# Altium PCB LM-003.PcbDoc (part 1 of 2)
Units mm, origin at the board's own origin, x right, y up, seen from the top; angles counter-clockwise.
Board outline 67.01 x 194 mm, 6 copper layers (Top Layer, +5V, Mid-Layer 1, +3.3V, Mid-Layer 2, Bottom Layer), stack 1.23 mm thick; 63 components, 97 nets, 377 pads, 45 vias.
Unrouted connection lines stored in the file: 85.
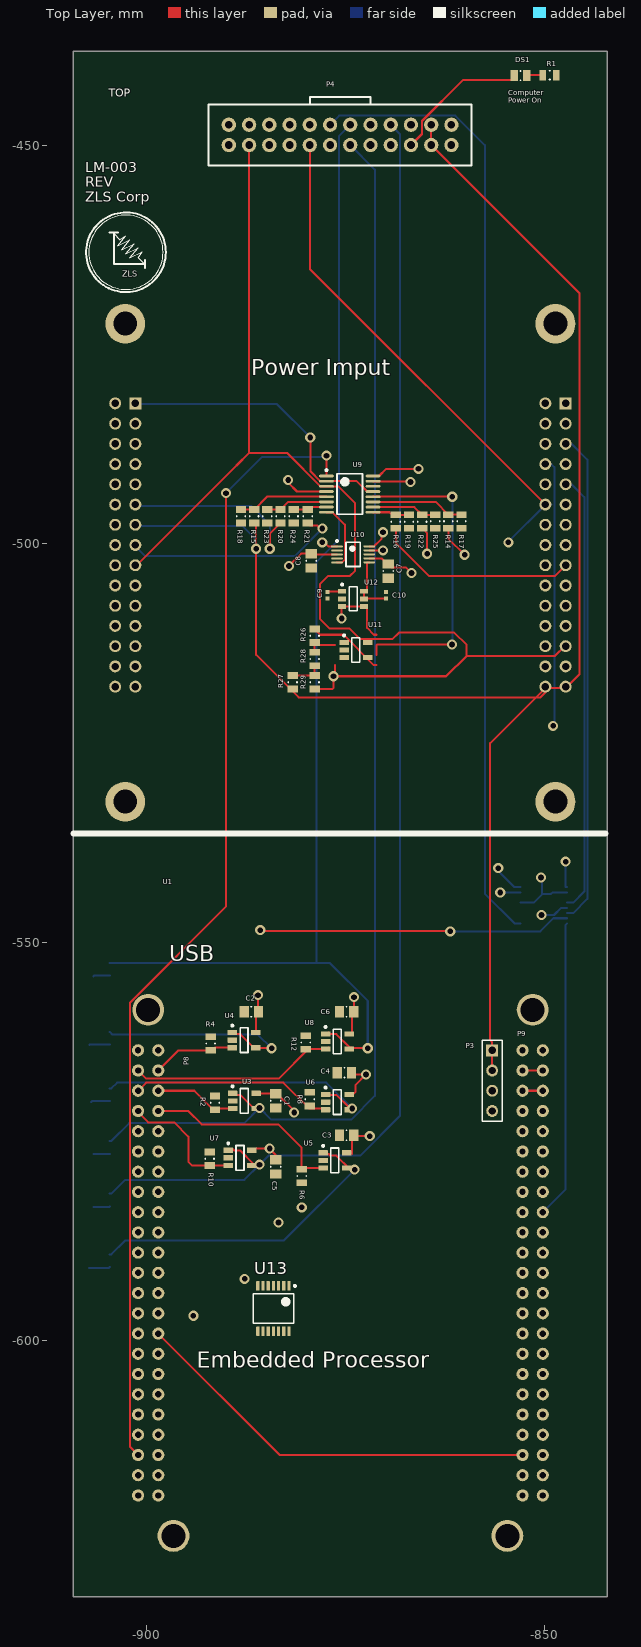
[diagram p0: Top Layer view]
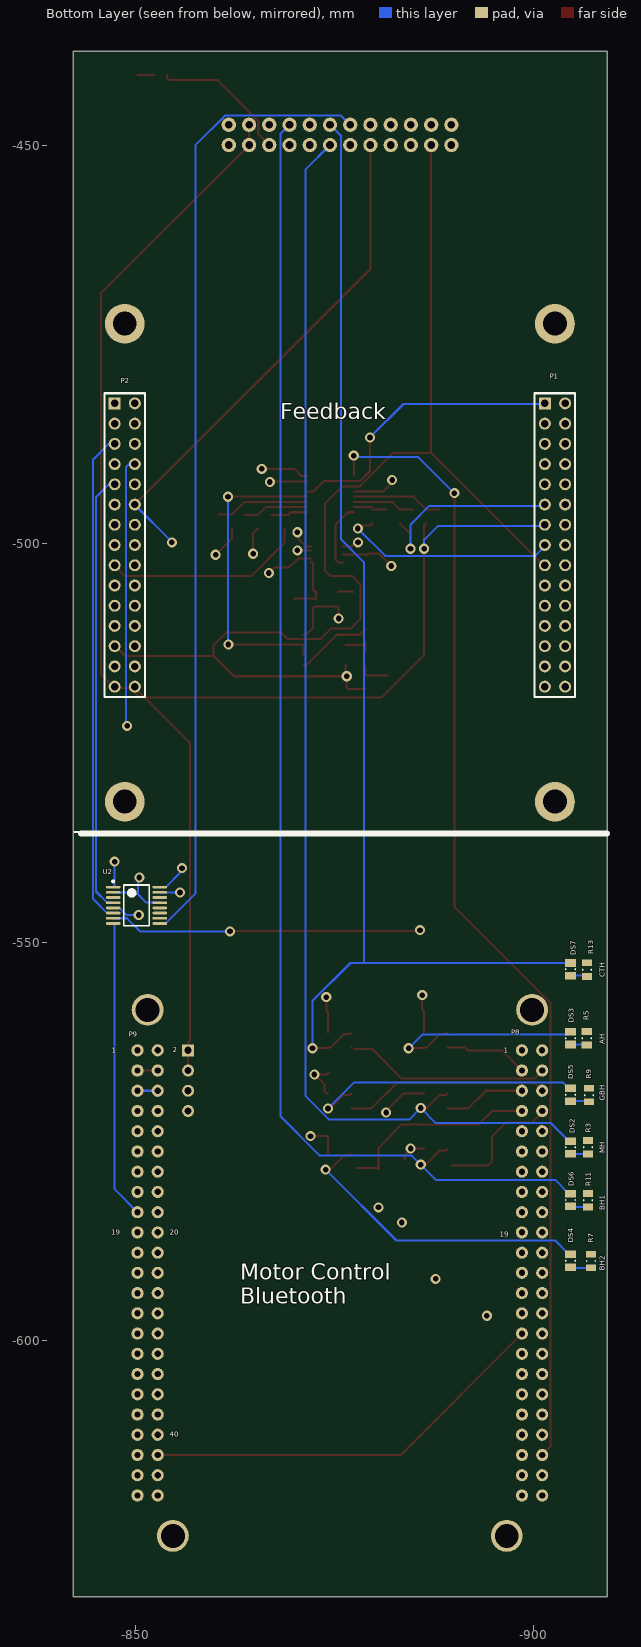
[diagram p1: Bottom Layer view, seen from below]
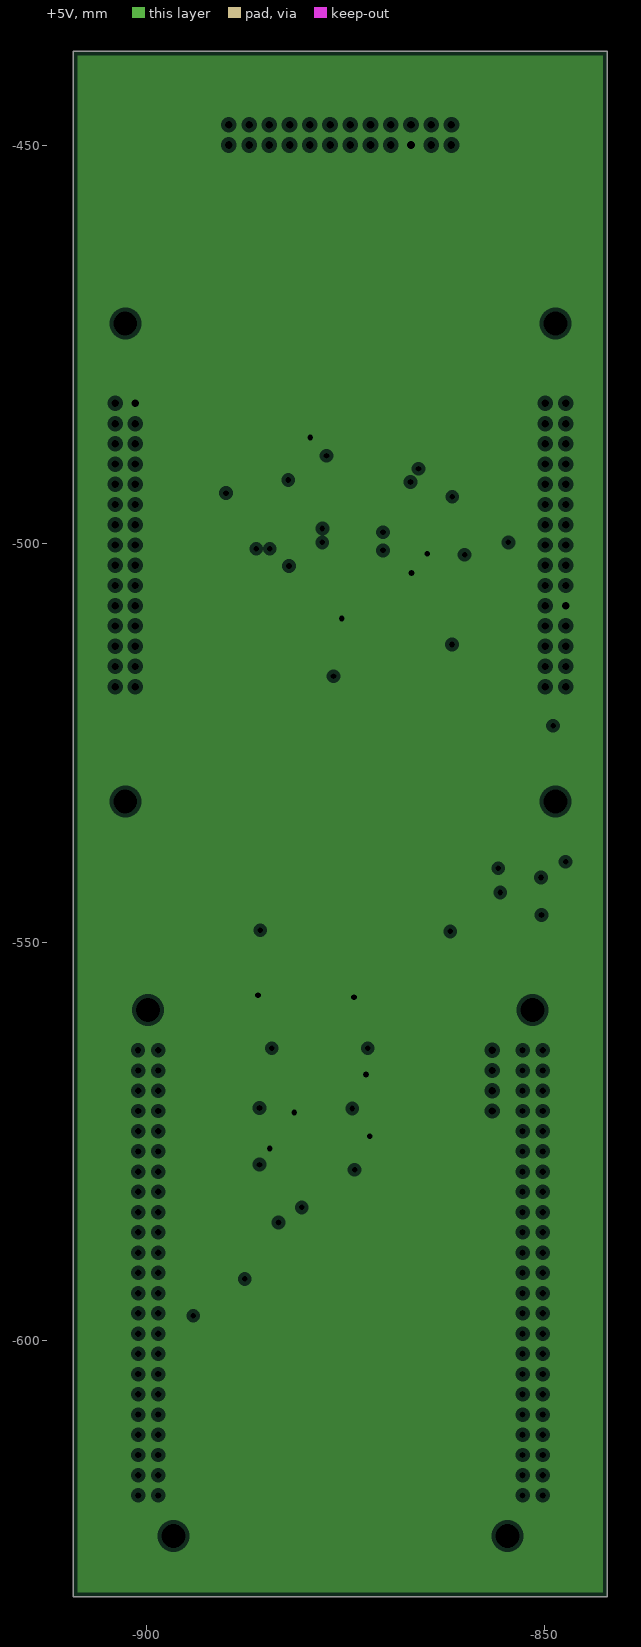
[diagram p2: +5V, clearances drawn from the general rule]
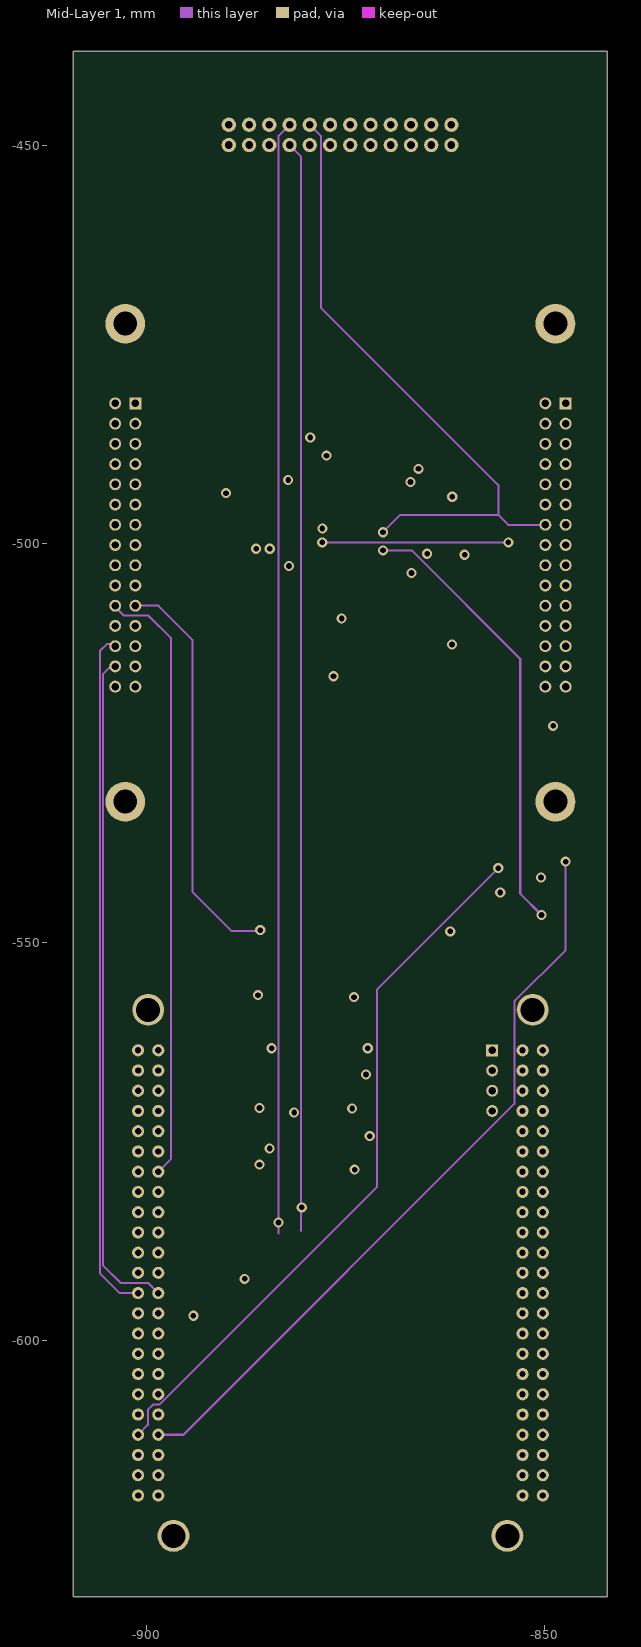
[diagram p3: Mid-Layer 1]
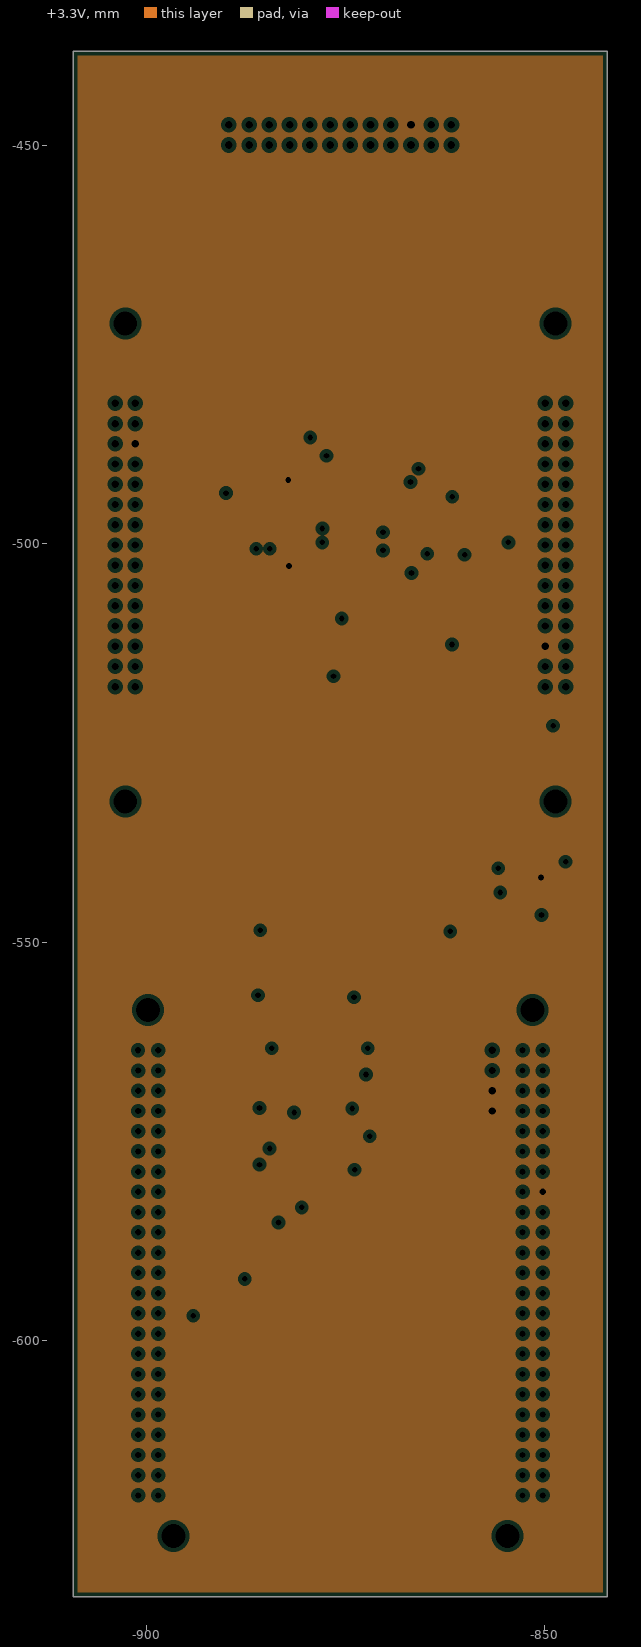
[diagram p4: +3.3V, clearances drawn from the general rule]
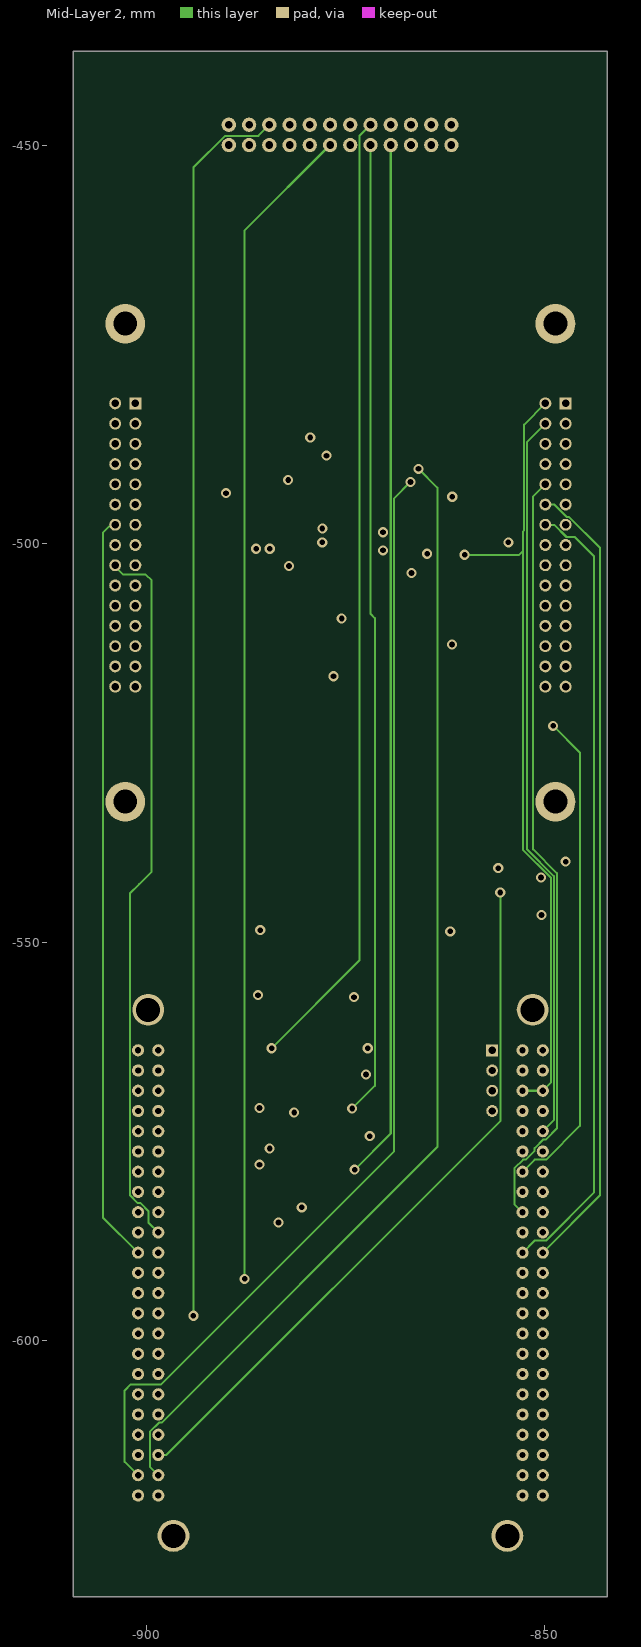
[diagram p5: Mid-Layer 2]

## Layer stack, top to bottom
Top Solder: solder mask 0.0102, Solder Resist, Dk 3.5
Top Layer: signal copper 0.0356
Dielectric 1: core 0.254, FR-4, Dk 4.2
+5V: plane copper 0.036, net +5
Dielectric 7: prepreg 0.127, Dk 4.2
Mid-Layer 1: signal copper 0.0356
Dielectric 6: core 0.254, Dk 4.2
+3.3V: plane copper 0.036, net +3.3
Dielectric2: prepreg 0.127, FR-4, Dk 4.2
Mid-Layer 2: signal copper 0.0356
Dielectric 5: core 0.254, Dk 4.2
Bottom Layer: signal copper 0.0356
Bottom Solder: solder mask 0.0102, Solder Resist, Dk 3.5

## Board outline
-909.17,-632.188 -842.165,-632.188 -842.165,-438.187 -909.17,-438.187

## Design rules (kind name [scope] priority, off if disabled: settings)
Clearance [All] p1: gap=0.127 ignorepadtopadclearanceinfootprint=FALSE except(0: Arc-Hole Track-Hole SMDPad-Hole THPad-Hole Via-Hole Fill-Hole Poly-Hole Region-Hole Text-Hole)
ComponentClearance [All] p1: gap=0.229 collisioncheckmode=3 verticalgap=0.254 showdistances=FALSE
HoleSize [All] p1: absolutevalues=TRUE maxlimit=5 minlimit=0.127 maxpercent=80.000 minpercent=20.000
MinimumAnnularRing [All] p1: minimumring=0.254
MinimumSolderMaskSliver [All] p1: minsoldermaskwidth=0.051
PlaneClearance [All] p1: clearance=0.508
PlaneConnect [All] p1: planeconnectstyle=Relief reliefexpansion=0.508 reliefentries=4 reliefconductorwidth=0.254 reliefairgap=0.254
PolygonConnect [All] p1: connectstyle=Relief reliefconductorwidth=0.254 reliefentries=4 polygonreliefangle="90 Angle" airgapwidth=0.254
RoutingVias [All] p1: holewidth=0.3 width=0.7 viastyle="Through Hole" minholewidth=0.1 minwidth=0.381 maxholewidth=0.711 maxwidth=1.27
SilkToSilkClearance [All] p1: silktosilkclearance=0.1
SilkToSolderMaskClearance [IsPad] p1: minsilkscreentomaskgap=0.064 clearancetoexposedcopper=TRUE
SolderMaskExpansion [All] p1: expansion=0.051
Width [All] p1: maxlimit=1 minlimit=0.127 preferedwidth=0.254
23 further rules are at their usual default settings.

## Classes and differential pairs
component class heater_control: C1 C2 C3 C4 C5 C6 DS2 DS3 DS4 DS5 DS6 DS7 P4 R2 R3 R4 R5 R6 R7 R8 R9 R10 R11 R12 R13 U3 U4 U5 U6 U7 U8
component class ADC: C7 C8 C9 C10 R14 R15 R16 R17 R18 R19 R20 R21 R22 R23 R24 R25 R26 R27 R28 R29 U9 U10 U11 U12
component class Connectors: DS1 P1 P2 P3 P14 P16 P? R1
component class "BBB Headers": U1 U2 U13

## Components (designator, comment, footprint, x,y, rotation, side; value= is the part's Value field where it differs from the comment)
C1 "CAP CER 0.1UF 25V X7R 0805" CAPC0805(2012)145_N -883.758,-569.941 r90 top
C2 "CAP CER 0.1UF 25V X7R 0805" CAPC0805(2012)145_N -886.806,-558.765 r0 top
C3 "CAP CER 0.1UF 25V X7R 0805" CAPC0805(2012)145_N -874.868,-574.259 r0 top
C4 "CAP CER 0.1UF 25V X7R 0805" CAPC0805(2012)145_N -875.122,-566.385 r0 top
C5 "CAP CER 0.1UF 25V X7R 0805" CAPC0805(2012)145_N -883.758,-578.231 r90 top
C6 "CAP CER 0.1UF 25V X7R 0805" CAPC0805(2012)145_N -874.868,-558.765 r0 top
C7 "CAP CER 0.1UF 25V X7R 0805" CAPC0805(2012)145_N -869.637,-503.431 r270 top
C8 "CAP CER 0.1UF 25V X7R 0805" CAPC0805(2012)145_N -879.289,-502.161 r270 top
C9 "0.1uF" CAPC0402(1005)60_L -877.257,-506.479 r270 top
C10 "0.1uF" CAPC0402(1005)60_L -869.891,-506.479 r270 top
DS1 "Lite-On LTST-S220KGKT Green LED, 571 nm 2012 (0805) Side View, Rectangle Lens SMD package" 0805C_L -853.031,-441.239 r0 top
DS2 "Visible Name Value Type    False Description Lite-On LTST-S220KRKT Red LED, 631 nm 2012 (0805) Side View, Rectangle Lens SMD package STRING" 0805C_L -904.586,-575.783 r270 bottom
DS3 "Visible Name Value Type    False Description Lite-On LTST-S220KRKT Red LED, 631 nm 2012 (0805) Side View, Rectangle Lens SMD package STRING" 0805C_L -904.586,-562.067 r270 bottom
DS4 "Visible Name Value Type    False Description Lite-On LTST-S220KRKT Red LED, 631 nm 2012 (0805) Side View, Rectangle Lens SMD package STRING" 0805C_L -904.586,-590.007 r270 bottom
DS5 "Visible Name Value Type    False Description Lite-On LTST-S220KRKT Red LED, 631 nm 2012 (0805) Side View, Rectangle Lens SMD package STRING" 0805C_L -904.586,-569.179 r270 bottom
DS6 "Visible Name Value Type    False Description Lite-On LTST-S220KRKT Red LED, 631 nm 2012 (0805) Side View, Rectangle Lens SMD package STRING" 0805C_L -904.586,-582.387 r270 bottom
DS7 "Visible Name Value Type    False Description Lite-On LTST-S220KRKT Red LED, 631 nm 2012 (0805) Side View, Rectangle Lens SMD package STRING" 0805C_L -904.586,-553.431 r270 bottom
P1 "SSW-115-23-G-D" SSW-115-23-G-D -901.365,-482.387 r270 bottom locked
P2 "SSW-115-23-G-D" SSW-115-23-G-D -847.365,-482.387 r270 bottom locked
P3 "TSW-104-14-G-S" HDR1X4 -856.58,-563.591 r270 top locked
P4 "IPL1-112-01-F-S-K" IPL1-112-01-F-S-K -875.665,-448.691 r0 top
R1 "5.1K" RESC0805(2012)_L -849.376,-441.191 r0 top
R2 "20k" RESC0805(2012)_L -891.378,-570.195 r90 top
R3 "4.99K" RESC0805(2012)_L -906.78,-575.777 r90 bottom
R4 "20K" RESC0805(2012)_L -891.921,-562.737 r90 top
R5 "4.99k" RESC0805(2012)_L -906.618,-562.067 r90 bottom
R6 "20K" RESC0805(2012)_L -880.491,-579.374 r270 top
R7 "4.99K" RESC0805(2012)_L -907.161,-590.042 r90 bottom
R8 "20K" RESC0805(2012)_L -879.475,-569.722 r90 top
R9 "4.99K" RESC0805(2012)_L -906.907,-569.214 r90 bottom
R10 "20K" RESC0805(2012)_L -892.048,-577.215 r90 top
R11 "4.99K" RESC0805(2012)_L -906.78,-582.422 r90 bottom
R12 "20K" RESC0805(2012)_L -879.983,-562.61 r90 top
R13 "4.99K" RESC0805(2012)_L -906.653,-553.466 r90 bottom
R14 "10k" RESC0805(2012)_L -862.076,-497.205 r90 top
R15 "47.5K" RESC0805(2012)_L -886.461,-496.57 r90 top
R16 "100K" RESC0805(2012)_L -868.68,-497.227 r90 top
R17 "10k" RESC0805(2012)_L -860.425,-497.205 r270 top
R18 "10k" RESC0805(2012)_L -888.111,-496.57 r270 top
R19 "10k" RESC0805(2012)_L -867.029,-497.227 r270 top
R20 "47.5K" RESC0805(2012)_L -883.158,-496.57 r90 top
R21 "47.5K" RESC0805(2012)_L -879.729,-496.57 r90 top
R22 "10k" RESC0805(2012)_L -865.378,-497.227 r90 top
R23 "10k" RESC0805(2012)_L -884.809,-496.57 r270 top
R24 "10k" RESC0805(2012)_L -881.507,-496.57 r270 top
R25 "10k" RESC0805(2012)_L -863.727,-497.205 r270 top
R26 "100K" RESC0805(2012)_L -878.867,-511.556 r90 top
R27 "100k" RESC0805(2012)_L -881.634,-517.398 r90 top
R28 "100k" RESC0805(2012)_L -878.867,-514.477 r90 top
R29 "15k" RESC0805(2012)_L -878.867,-517.398 r270 top
U1 "BBB Header x 2" "BEAGLEBONE BLACK THRU" -875.63,-591.531 r0 top locked
U2 "ADG1608BRUZ" ADI-RU-16_M -850.104,-545.392 r180 bottom
U3 "OPA188AIDBVR" DBV0005A_M -887.695,-569.941 r0 top
U4 "OPA188AIDBVR" DBV0005A_M -887.73,-562.321 r0 top
U5 "OPA188AIDBVR" DBV0005A_M -876.326,-577.411 r0 top
U6 "OPA188AIDBVR" DBV0005A_M -876.022,-570.103 r0 top
U7 "OPA188AIDBVR" DBV0005A_M -888.238,-577.088 r0 top
U8 "OPA188AIDBVR" DBV0005A_M -876.022,-562.483 r0 top
U9 "ADG1608BRUZ" ADI-RU-16_M -874.463,-493.779 r0 top
U10 "MAX11100EUB+T" U10+2_L -874.034,-501.344 r0 top
U11 "OPA188AIDBVR" DBV0005A_M -873.701,-513.337 r0 top
U12 "MAX6070AAUT41+T" SOT95P280X445-6N -874.034,-506.932 r0 top
U13 "OPA4188AIPW" PW0014A_L -884.047,-596.011 r270 top

## Footprints (in the part's own frame and the unit in brackets; to place one, negate y for a bottom-side part, rotate by r counter-clockwise, add the part's x,y. Pads: shape width x height; smd on the part's side, far side on the other; paste and mask are expansions set on the pad)
0805C_L [mm]
  rect 0.95x1.35 smd: 1(-0.8,0) 2(0.8,0)
  silkscreen extent -0.05,-0.58 0.05,0.58, body extent -1.1,-0.72 1.1,0.72, height 0.75
ADI-RU-16_M [mm] "SOP, 16-Leads, Body 5x4.4mm, Pitch 0.65mm, IPC Low Density"
  oval 1.85x0.35 smd: 1(-2.925,2.275) 2(-2.925,1.625) 3(-2.925,0.975) 4(-2.925,0.325) 5(-2.925,-0.325) 6(-2.925,-0.975) 7(-2.925,-1.625) 8(-2.925,-2.275) 9(2.925,-2.275) 10(2.925,-1.625) 11(2.925,-0.975) 12(2.925,-0.325) 13(2.925,0.325) 14(2.925,0.975) 15(2.925,1.625) 16(2.925,2.275)
  silkscreen extent -3.05,-2.55 1.6,3.12, body extent -2.25,-2.55 2.25,2.55, height 1.2
"BEAGLEBONE BLACK THRU" [mil]
  round 60 hole 31.5: 8-1(-900,1100) 8-3(-900,1000) 8-4(-1000,1000) 8-5(-900,900) 8-6(-1000,900) 8-7(-900,800) 8-8(-1000,800) 8-9(-900,700) 8-10(-1000,700) 8-11(-900,600) 8-12(-1000,600) 8-13(-900,500) 8-14(-1000,500) 8-15(-900,400) 8-16(-1000,400) 8-17(-900,300) 8-18(-1000,300) 8-19(-900,200) 8-20(-1000,200) 8-21(-900,100) 8-22(-1000,100) 8-23(-900,0) 8-24(-1000,0) 8-25(-900,-100) 8-26(-1000,-100) 8-27(-900,-200) 8-28(-1000,-200) 8-29(-900,-300) 8-30(-1000,-300) 8-31(-900,-400) 8-32(-1000,-400) 8-33(-900,-500) 8-34(-1000,-500) 8-35(-900,-600) 8-36(-1000,-600) 8-37(-900,-700) 8-38(-1000,-700) 8-39(-900,-800) 8-40(-1000,-800) 8-41(-900,-900) 8-42(-1000,-900) 8-43(-900,-1000) 8-44(-1000,-1000) 8-45(-900,-1100) 8-46(-1000,-1100) 9-1(1000,1100) 9-2(900,1100) 9-3(1000,1000) 9-4(900,1000) 9-5(1000,900) 9-6(900,900) 9-7(1000,800) 9-8(900,800) 9-9(1000,700) 9-10(900,700) 9-11(1000,600) 9-12(900,600) 9-13(1000,500) 9-14(900,500) 9-15(1000,400) 9-16(900,400) 9-17(1000,300) 9-18(900,300) 9-19(1000,200) 9-20(900,200) 9-21(1000,100) 9-22(900,100) 9-23(1000,0) 9-24(900,0) 9-25(1000,-100) 9-26(900,-100) 9-27(1000,-200) 9-28(900,-200) 9-29(1000,-300) 9-30(900,-300) 9-31(1000,-400) 9-32(900,-400) 9-33(1000,-500) 9-34(900,-500) 9-35(1000,-600) 9-36(900,-600) 9-37(1000,-700) 9-38(900,-700) 9-39(1000,-800) 9-40(900,-800) 9-41(1000,-900) 9-42(900,-900) 9-43(1000,-1000) 9-44(900,-1000) 9-45(1000,-1100) 9-46(900,-1100)
  round 60 hole 30 paste+0: 8-2(-1000,1100)
  round 157.48 hole 118.11 paste+0: ""(-950,1300)
  round 157.48 hole 118.11: ""(-825,-1300) ""(825,-1300) ""(950,1300)
  body extent -1048,-1163 1048,1160, height 315
CAPC0402(1005)60_L [mm] "Chip Capacitor, Body 1.0x0.5mm, Height 0.6mm, IPC High Density"
  rect 0.52x0.52 smd: 1(-0.4,0) 2(0.4,0)
  body extent -0.55,-0.3 0.55,0.3, height 0.6
CAPC0805(2012)145_N [mm] "Chip Capacitor, Body 2.0x1.2mm, Height 1.45mm, IPC Medium Density"
  rect 1.15x1.45 smd: 1(-0.9,0) 2(0.9,0)
  silkscreen extent -0.05,-0.62 0.05,0.63, body extent -1.1,-0.72 1.1,0.73, height 1.45
DBV0005A_M [mm] "SOT23, 5-Leads, Body 3.05x1.75mm, Pitch 0.95mm, IPC Low Density"
  rrect15% 1.2x0.65 smd: 1(-1.475,0.95) 2(-1.475,0) 3(-1.475,-0.95) 4(1.475,-0.95) 5(1.475,0.95)
  silkscreen extent -1.6,-1.55 0.5,1.95, body extent -1.42,-1.46 1.42,1.46, height 1.08
HDR1X4 [mm] "Connector; Header; 4 Position"
  rect 1.5x1.5 hole 0.9: 1(0,0)
  round 1.5 hole 0.9: 2(2.54,0) 3(5.08,0) 4(7.62,0)
  silkscreen extent -1.27,-1.27 8.89,1.27
IPL1-112-01-F-S-K [mm]
  round 1.8 hole 0.95: 1(-13.97,-1.27) 2(-13.97,1.27) 3(-11.43,-1.27) 4(-11.43,1.27) 5(-8.89,-1.27) 6(-8.89,1.27) 7(-6.35,-1.27) 8(-6.35,1.27) 9(-3.81,-1.27) 10(-3.81,1.27) 11(-1.27,-1.27) 12(-1.27,1.27) 13(1.27,-1.27) 14(1.27,1.27) 15(3.81,-1.27) 16(3.81,1.27) 17(6.35,-1.27) 18(6.35,1.27) 19(8.89,-1.27) 20(8.89,1.27) 21(11.43,-1.27) 22(11.43,1.27) 23(13.97,-1.27) 24(13.97,1.27)
  silkscreen extent -16.51,-3.81 16.51,3.81, body extent -15.95,-4.32 16.05,3.56, height 8.13
PW0014A_L [mm] "SOP, 14-Leads, Body 5.1x4.5mm, Pitch 0.65mm, IPC High Density"
  rrect25% 1.2x0.4 smd: 1(-2.85,1.95) 2(-2.85,1.3) 3(-2.85,0.65) 4(-2.85,0) 5(-2.85,-0.65) 6(-2.85,-1.3) 7(-2.85,-1.95) 8(2.85,-1.95) 9(2.85,-1.3) 10(2.85,-0.65) 11(2.85,0) 12(2.85,0.65) 13(2.85,1.3) 14(2.85,1.95)
  silkscreen extent -2.97,-2.55 1.85,2.83, body extent -3.21,-2.5 3.21,2.5, height 1
RESC0805(2012)_L [mm] "Chip Resistor, Body 2.0x1.3mm, IPC High Density"
  rect 0.85x1.3 smd: 1(-0.85,0) 2(0.85,0)
  silkscreen extent -0.05,-0.55 0.05,0.55, body extent -1.1,-0.67 1.1,0.68, height 0.7
SOT95P280X445-6N [mm] "SOT23, 6-Leads, Body 2.90x2.80mm, Pitch 0.95mm, IPC Medium Density"
  rect 1x0.6 smd: 1(-1.375,0.95) 2(-1.375,0) 3(-1.375,-0.95) 4(1.375,-0.95) 5(1.375,0) 6(1.375,0.95)
  silkscreen extent -1.5,-1.5 0.5,1.92, body extent -2.11,-1.78 2.11,1.73, height 1.08
SSW-115-23-G-D [mm]
  rect 1.5x1.5 hole 0.92: 1(0,0)
  round 1.5 hole 0.92: 2(0,2.54) 3(2.54,0) 4(2.54,2.54) 5(5.08,0) 6(5.08,2.54) 7(7.62,0) 8(7.62,2.54) 9(10.16,0) 10(10.16,2.54) 11(12.7,0) 12(12.7,2.54) 13(15.24,0) 14(15.24,2.54) 15(17.78,0) 16(17.78,2.54) 17(20.32,0) 18(20.32,2.54) 19(22.86,0) 20(22.86,2.54) 21(25.4,0) 22(25.4,2.54) 23(27.94,0) 24(27.94,2.54) 25(30.48,0) 26(30.48,2.54) 27(33.02,0) 28(33.02,2.54) 29(35.56,0) 30(35.56,2.54)
  silkscreen extent -1.27,-1.27 36.83,3.81, body extent -1.52,-1.27 37.08,3.68, height 8.51
U10+2_L [mm] "TSSOP, 10-Leads, Body 3x3mm, Pitch 0.5mm, IPC High Density"
  oval 1.45x0.25 smd: 1(-2.025,1) 2(-2.025,0.5) 3(-2.025,0) 4(-2.025,-0.5) 5(-2.025,-1) 6(2.025,-1) 7(2.025,-0.5) 8(2.025,0) 9(2.025,0.5) 10(2.025,1)
  silkscreen extent -2.15,-1.53 0.9,1.8, body extent -1.55,-1.55 1.55,1.55, height 1.1

## Part data
C1 C2 C3 C4 C5 C6 C7 C8: library part CMP-1036-04795-1, Capacitance=0.1µF, Manufacturer="Murata Electronics North America", Manufacturer Part Number=GRM21BR71E104KA01L, Operating Temperature="-55°C ~ 125°C", Package / Case="0805 (2012 Metric)", Ratings=-, Supplier Part Number 1=490-1673-6-ND, Temperature Coefficient=X7R, Tolerance=±10%, Voltage - Rated=25V, Applications="General Purpose", Category=Capacitors, ComponentLink1Description=http://www.murata.com/~/media/webrenewal/support/library/catalog/products/capacitor/mlcc/c02e.ashx, ComponentLink1URL=http://www.murata.com/~/media/webrenewal/support/library/catalog/products/capacitor/mlcc/c02e.ashx, Features=-, Height - Seated (Max)=-, Lead Spacing=-, Lead Style=-, Mounting Type="Surface Mount, MLCC", Packaging=Digi-Reel®, Part Status=Active, Pricing 1="1=0.2, 10=0.145, 100=0.0683, 500=0.04788, 1000=0.03964 (USD)", RoHS="RoHS Compliant", Size / Dimension="0.079\" L x 0.049\" W (2.00mm x 1.25mm)", Stock 1=891652, Supplier 1=Digi-Key, Thickness (Max)="0.053\" (1.35mm)"
C9 C10: library part CMP-1034-00252-1, "CAP CER 0.1UF 10V X7R 0402", Manufacturer="Murata Electronics North America", Manufacturer Part Number=GRM155R71A104KA01D, Operating Temperature="-55°C ~ 125°C", Package / Case="0402 (1005 Metric)", Ratings=-, Supplier Part Number 1=490-6321-1-ND, Temperature Coefficient=X7R, Tolerance=±10%, Voltage - Rated=10V, Applications="General Purpose", Category=Capacitors, ComponentLink1Description=http://www.murata.com/~/media/webrenewal/support/library/catalog/products/capacitor/mlcc/c02e.ashx?la=en-us, ComponentLink1URL=http://www.murata.com/~/media/webrenewal/support/library/catalog/products/capacitor/mlcc/c02e.ashx?la=en-us, Features=-, Height - Seated (Max)=-, Lead Spacing=-, Mounting Type="Surface Mount, MLCC", Packaging="Cut Tape (CT)", Part Status=Active, Pricing 1="1=0.1, 10=0.014, 100=0.0063, 500=0.00446, 1000=0.00351, 2500=0.00319, 5000=0.00293 (USD)", RoHS="RoHS Compliant", Size / Dimension="0.039\" L x 0.020\" W (1.00mm x 0.50mm)", Stock 1=2920395, Supplier 1=Digi-Key, Thickness (Max)="0.022\" (0.55mm)"
DS1: library part "LED A/K", Case/Package=0805, Case Code (Metric)=2012, Colour=Green, Forward Current=20mA, Forward Voltage=2V, Lens Colour=Colorless, Manufacturer="Vishay / Lite-On", Manufacturer Part Number=LTST-S220KGKT, Max Operating Temperature=85°C, Min Operating Temperature=-55°C, Package Quantity=4000, Power Dissipation=75W, Power Rating=75mW, Supplier Part Number 1=160-1468-1-ND, Case Code (Imperial)=0805, ComponentLink1Description=https://datasheet.ciiva.com/11775/0900766b80dc0b70-11775441.pdf, ComponentLink1URL=https://datasheet.ciiva.com/11775/0900766b80dc0b70-11775441.pdf, ComponentLink2Description=https://datasheet.ciiva.com/2110/s-110-ltst-s220kgkt-2110069.pdf, ComponentLink2URL=https://datasheet.ciiva.com/2110/s-110-ltst-s220kgkt-2110069.pdf, ComponentLink3Description=https://datasheet.ciiva.com/2110/s-110-ltst-s220kgkt-2110070.pdf, ComponentLink3URL=https://datasheet.ciiva.com/2110/s-110-ltst-s220kgkt-2110070.pdf, ComponentLink4Description=https://datasheet.ciiva.com/12400/100-ltst-s220kgkt-59602-12400886.pdf, ComponentLink4URL=https://datasheet.ciiva.com/12400/100-ltst-s220kgkt-59602-12400886.pdf, ComponentLink5Description=https://datasheet.ciiva.com/2110/s-110-ltst-s220kgkt-2110071.pdf, ComponentLink5URL=https://datasheet.ciiva.com/2110/s-110-ltst-s220kgkt-2110071.pdf, ComponentLink6Description=https://datasheet.ciiva.com/16379/ltst-s220kgkt-16379082.pdf, ComponentLink6URL=https://datasheet.ciiva.com/16379/ltst-s220kgkt-16379082.pdf, Depth=0.6mm, Dominant Wavelength=568nm, Height=0.6mm, Illumination Colour=Green, Lead Free="Lead Free", Length=2.1mm, Lens Style=Diffused,Colorless, Lens Transparency=Clear, Luminous Intensity=35mcd, Mount="Surface Mount", Number of Elements=1, Number of LEDs=1, Number of Pins=2, Packaging="Tape and Reel", Pricing 1="1=0.29, 10=0.212, 25=0.1564, 100=0.1117, 250=0.0759, 500=0.067, 1000=0.0525 (USD)", Radiation Hardening=No, Stock 1=74800, Supplier 1=Digi-Key, Test Current=20mA, Viewing Angle=130°, Wavelength=574nm, Width=1mm
DS2 DS3 DS4 DS5 DS6 DS7: library part "LED A/K", Case/Package=0805, Case Code (Metric)=2012, Colour=Red, Forward Current=20mA, Forward Voltage=2V, Lens Colour=Colorless, Manufacturer="Vishay / Lite-On", Manufacturer Part Number=LTST-S220KRKT, Max Operating Temperature=85°C, Min Operating Temperature=-55°C, Package Quantity=4000, Power Dissipation=75mW, Supplier Part Number 1=160-1469-1-ND, Case Code (Imperial)=0805, ComponentLink1Description=https://datasheet.ciiva.com/2110/s-110-ltst-s220krkt-2110132.pdf, ComponentLink1URL=https://datasheet.ciiva.com/2110/s-110-ltst-s220krkt-2110132.pdf, ComponentLink2Description=https://datasheet.ciiva.com/2110/s-110-ltst-s220krkt-2110133.pdf, ComponentLink2URL=https://datasheet.ciiva.com/2110/s-110-ltst-s220krkt-2110133.pdf, ComponentLink3Description=https://datasheet.ciiva.com/2110/s-110-ltst-s220krkt-2110134.pdf, ComponentLink3URL=https://datasheet.ciiva.com/2110/s-110-ltst-s220krkt-2110134.pdf, ComponentLink4Description=https://datasheet.ciiva.com/12403/lite-on-ltst-s220krkt-187389-12403798.pdf, ComponentLink4URL=https://datasheet.ciiva.com/12403/lite-on-ltst-s220krkt-187389-12403798.pdf, ComponentLink5Description=https://datasheet.ciiva.com/16345/lite-onltst-s220krkt-16345511.pdf, ComponentLink5URL=https://datasheet.ciiva.com/16345/lite-onltst-s220krkt-16345511.pdf, ComponentLink6Description=https://datasheet.ciiva.com/15118/getdatasheetpartid-225752-15118120.pdf, ComponentLink6URL=https://datasheet.ciiva.com/15118/getdatasheetpartid-225752-15118120.pdf, ComponentLink7Description=https://datasheet.ciiva.com/14633/0900766b80dc0b76-14633737.pdf, ComponentLink7URL=https://datasheet.ciiva.com/14633/0900766b80dc0b76-14633737.pdf, ComponentLink8Description=https://datasheet.ciiva.com/11775/0900766b80dc0b76-11775439.pdf, ComponentLink8URL=https://datasheet.ciiva.com/11775/0900766b80dc0b76-11775439.pdf, Depth=0.6mm, Dominant Wavelength=631nm, Height=0.6mm, Illumination Colour=Red, Lead Free="Lead Free", Length=2.1mm, Lens Style=Diffused,Colorless, Lens Transparency=Clear, Luminous Intensity=54mcd, Mount="Surface Mount", Number of Elements=1, Number of LEDs=1, Number of Pins=2, Packaging="Tape and Reel", Power Rating=75mW, Pricing 1="1=0.31, 10=0.225, 25=0.1656, 100=0.1183, 250=0.0804, 500=0.071, 1000=0.0556 (USD)", Radiation Hardening=No, Stock 1=108191, Supplier 1=Digi-Key, Test Current=20mA, Viewing Angle=130°, Wavelength=639nm, Width=1mm
P1 P2: library part "Header 15X2", "Header, 15-Pin, Dual row", Current Rating="5.7A per Contact", Insulation Color=Black, Manufacturer="Samtec Inc.", Material Flammability Rating="UL94 V-0", Operating Temperature="-55°C ~ 125°C", Supplier Part Number 1=SSW-115-23-G-D-ND, Voltage Rating=-, Applications=-, Category="Connectors, Interconnects", Connector Type=Receptacle, Contact Finish - Mating=Gold, Contact Finish - Post=Gold, Contact Finish Thickness - Mating="20.0µin (0.51µm)", Contact Finish Thickness - Post="3.00µin (0.076µm)", Contact Length - Post="0.394\" (10.00mm)", Contact Material="Phosphor Bronze", Contact Shape=Square, Contact Type=Forked, Fastening Type=Push-Pull, Features=-, Ingress Protection=-, Insulation Height="0.335\" (8.51mm)", Insulation Material="Liquid Crystal Polymer (LCP)", Manufacturer Part Number=SSW-115-23-G-D, Mated Stacking Heights=-, Mounting Type="Through Hole", Number of Positions=30, Number of Positions Loaded=All, Packaging=Bulk, Part Status=Active, Pitch - Mating="0.100\" (2.54mm)", Pricing 1="1=5.3 (USD)", RoHS="RoHS Compliant", Row Spacing - Mating="0.100\" (2.54mm)", Stock 1=0, Style="Board to Board or Cable", Supplier 1=Digi-Key, Termination=Solder
P3: library part "Header 4", "Header, 4-Pin", Current Rating=-, Insulation Color=Black, Manufacturer="Samtec Inc.", Material Flammability Rating="UL94 V-0", Operating Temperature="-55°C ~ 125°C", Supplier Part Number 1=SAM1053-04-ND, Applications=-, Category="Connectors, Interconnects", ComponentLink1Description=http://suddendocs.samtec.com/prints/tsw-xxx-xx-xxx-x-xx-xxx-mkt.pdf, ComponentLink1URL=http://suddendocs.samtec.com/prints/tsw-xxx-xx-xxx-x-xx-xxx-mkt.pdf, Connector Type=Header, Contact Finish - Mating=Gold, Contact Finish - Post=Gold, Contact Finish Thickness - Mating="10.0µin (0.25µm)", Contact Finish Thickness - Post="3.00µin (0.076µm)", Contact Length - Mating="0.320\" (8.13mm)", Contact Length - Post="0.110\" (2.79mm)", Contact Material="Phosphor Bronze", Contact Shape=Square, Contact Type="Male Pin", Fastening Type=Push-Pull, Features=-, Ingress Protection=-, Insulation Height="0.100\" (2.54mm)", Insulation Material="Polybutylene Terephthalate (PBT)", Manufacturer Part Number=TSW-104-14-G-S, Mated Stacking Heights=-, Mounting Type="Through Hole", Number of Positions=4, Number of Positions Loaded=All, Number of Rows=1, Overall Contact Length="0.530\" (13.46mm)", Packaging=Bulk, Part Status=Active, Pitch - Mating="0.100\" (2.54mm)", Pricing 1="1=1.02, 10=0.915, 100=0.7537, 500=0.59578, 1000=0.51143, 5000=0.46657, 10000=0.44863 (USD)", RoHS="RoHS Compliant", Row Spacing - Mating=-, Shrouding=Unshrouded, Stock 1=278, Style="Board to Board or Cable", Supplier 1=Digi-Key, Termination=Solder, Voltage Rating=-
P4: "IPL1-112-01-F-D-K", Manufacturer="Samtec Inc.", Supplier Part Number 1=IPL1-112-01-F-S-K-ND, Category="Connectors, Interconnects", Manufacturer Part Number=IPL1-112-01-F-S-K, Part Status=Active, Pricing 1="1=2.63 (USD)", RoHS="RoHS Compliant", Stock 1=0, Supplier 1=Digi-Key
R1: library part CMP-1013-00215-1, "RES SMD 5.1K OHM 5% 1/8W 0805", Manufacturer="Vishay Dale", Manufacturer Part Number=CRCW08055K10JNEA, Operating Temperature="-55°C ~ 155°C", Package / Case="0805 (2012 Metric)", Power (Watts)="0.125W, 1/8W", Supplier Device Package=0805, Supplier Part Number 1=541-5.1KACT-ND, Temperature Coefficient=±200ppm/°C, Tolerance=±5%, Category=Resistors, ComponentLink1Description=http://www.vishay.com/docs/20035/dcrcwe3.pdf, ComponentLink1URL=http://www.vishay.com/docs/20035/dcrcwe3.pdf, Composition="Thick Film", Failure Rate=-, Features="Automotive AEC-Q200", Height - Seated (Max)="0.020\" (0.50mm)", Packaging="Cut Tape (CT)", Part Status=Active, Pricing 1="1=0.1, 10=0.044, 100=0.0178, 1000=0.00802, 2500=0.00696 (USD)", RoHS="RoHS Compliant", Size / Dimension="0.079\" L x 0.049\" W (2.00mm x 1.25mm)", Stock 1=429, Supplier 1=Digi-Key
R2 R4 R6 R8 R10 R12: library part CMP-1013-00215-1, "RES SMD 20K OHM 1% 1/8W 0805", Manufacturer="Panasonic Electronic Components", Manufacturer Part Number=ERJ-6ENF2002V, Operating Temperature="-55°C ~ 155°C", Package / Case="0805 (2012 Metric)", Power (Watts)="0.125W, 1/8W", Supplier Device Package=0805, Supplier Part Number 1=P20.0KCCT-ND, Temperature Coefficient=±100ppm/°C, Tolerance=±1%, Category=Resistors, ComponentLink1Description=https://industrial.panasonic.com/cdbs/www-data/pdf/RDA0000/AOA0000C304.pdf, ComponentLink1URL=https://industrial.panasonic.com/cdbs/www-data/pdf/RDA0000/AOA0000C304.pdf, Composition="Thick Film", Failure Rate=-, Features="Automotive AEC-Q200", Height - Seated (Max)="0.028\" (0.70mm)", Packaging="Cut Tape (CT)", Part Status=Active, Pricing 1="1=0.11, 10=0.1, 100=0.0385, 1000=0.01695, 2500=0.01464 (USD)", RoHS="RoHS Compliant", Size / Dimension="0.079\" L x 0.049\" W (2.00mm x 1.25mm)", Stock 1=269698, Supplier 1=Digi-Key
R3 R5 R7 R9 R11 R13: library part CMP-1013-00215-1, "RES SMD 4.99K OHM 1% 1/8W 0805", Manufacturer="Panasonic Electronic Components", Manufacturer Part Number=ERJ-6ENF4991V, Operating Temperature="-55°C ~ 155°C", Package / Case="0805 (2012 Metric)", Power (Watts)="0.125W, 1/8W", Supplier Device Package=0805, Supplier Part Number 1=P4.99KCCT-ND, Temperature Coefficient=±100ppm/°C, Tolerance=±1%, Category=Resistors, ComponentLink1Description=https://industrial.panasonic.com/cdbs/www-data/pdf/RDA0000/AOA0000C304.pdf, ComponentLink1URL=https://industrial.panasonic.com/cdbs/www-data/pdf/RDA0000/AOA0000C304.pdf, Composition="Thick Film", Failure Rate=-, Features="Automotive AEC-Q200", Height - Seated (Max)="0.028\" (0.70mm)", Packaging="Cut Tape (CT)", Part Status=Active, Pricing 1="1=0.11, 10=0.1, 100=0.0385, 1000=0.01695, 2500=0.01464 (USD)", RoHS="RoHS Compliant", Size / Dimension="0.079\" L x 0.049\" W (2.00mm x 1.25mm)", Stock 1=1015773, Supplier 1=Digi-Key
R14 R17 R18 R19 R22 R23 R24 R25: library part CMP-1013-00215-1, "RES SMD 10K OHM 1% 1/8W 0805", Manufacturer=Yageo, Manufacturer Part Number=AT0603FRE0710KL, Operating Temperature="-55°C ~ 155°C", Package / Case="0603 (1608 Metric)", Power (Watts)="0.1W, 1/10W", Supplier Device Package=0603, Supplier Part Number 1=YAG2122CT-ND, Temperature Coefficient=±50ppm/°C, Tolerance=±1%, Category=Resistors, ComponentLink1Description=http://www.yageo.com/documents/recent/PYu-AT_51_RoHS_L_5.pdf, ComponentLink1URL=http://www.yageo.com/documents/recent/PYu-AT_51_RoHS_L_5.pdf, Composition="Thin Film", Failure Rate=-, Features="Anti-Sulfur, Automotive AEC-Q200, Moisture Resistant", Height - Seated (Max)="0.022\" (0.55mm)", Packaging="Cut Tape (CT)", Part Status=Active, Pricing 1="1=0.2, 10=0.17, 100=0.0664, 1000=0.02778, 2500=0.02546 (USD)", RoHS="RoHS Compliant", Size / Dimension="0.063\" L x 0.032\" W (1.60mm x 0.80mm)", Stock 1=13100, Supplier 1=Digi-Key
R15 R20 R21: library part CMP-1013-00215-1, "RES SMD 47.5K OHM 1% 1/10W 0805", Manufacturer=Yageo, Manufacturer Part Number=RT0603FRE0747K5L, Operating Temperature="-55°C ~ 155°C", Package / Case="0603 (1608 Metric)", Power (Watts)="0.1W, 1/10W", Supplier Device Package=0603, Supplier Part Number 1=YAG5964CT-ND, Temperature Coefficient=±50ppm/°C, Tolerance=±1%, Category=Resistors, ComponentLink1Description=http://www.yageo.com/documents/recent/PYu-RT_1-to-0.01_RoHS_L_9.pdf, ComponentLink1URL=http://www.yageo.com/documents/recent/PYu-RT_1-to-0.01_RoHS_L_9.pdf, Composition="Thin Film", Failure Rate=-, Features=-, Height - Seated (Max)="0.022\" (0.55mm)", Packaging="Cut Tape (CT)", Part Status=Active, Pricing 1="1=0.1, 10=0.068, 100=0.0275, 1000=0.01236, 2500=0.01073 (USD)", RoHS="RoHS Compliant", Size / Dimension="0.063\" L x 0.032\" W (1.60mm x 0.80mm)", Stock 1=5000, Supplier 1=Digi-Key
R16 R26 R27 R28: library part CMP-1013-00215-1, "RES SMD 100K OHM 1% 1/10W 0805", Manufacturer="Vishay Beyschlag", Manufacturer Part Number=MCS04020C1003FE000, Operating Temperature="-55°C ~ 155°C", Package / Case="0402 (1005 Metric)", Power (Watts)="0.1W, 1/10W", Supplier Device Package=0402, Supplier Part Number 1=MCS0402-100K-CFCT-ND, Temperature Coefficient=±50ppm/°C, Tolerance=±1%, Category=Resistors, ComponentLink1Description=http://www.vishay.com/docs/28705/mcx0x0xpro.pdf, ComponentLink1URL=http://www.vishay.com/docs/28705/mcx0x0xpro.pdf, Composition="Thin Film", Failure Rate=-, Features=Anti-Sulfur, Height - Seated (Max)="0.015\" (0.37mm)", Packaging="Cut Tape (CT)", Part Status=Active, Pricing 1="1=0.3, 10=0.254, 100=0.0993, 1000=0.04158, 2500=0.03812, 5000=0.03465 (USD)", RoHS="RoHS Compliant", Size / Dimension="0.039\" L x 0.020\" W (1.00mm x 0.50mm)", Stock 1=3521, Supplier 1=Digi-Key
R29: library part CMP-1013-00215-1, "RES SMD 15K OHM 1% 1/10W 0805", Manufacturer="Vishay Beyschlag", Manufacturer Part Number=MCS04020C1502FE000, Operating Temperature="-55°C ~ 155°C", Package / Case="0402 (1005 Metric)", Power (Watts)="0.1W, 1/10W", Supplier Device Package=0402, Supplier Part Number 1=749-1555-1-ND, Temperature Coefficient=±50ppm/°C, Tolerance=±1%, Category=Resistors, ComponentLink1Description=http://www.vishay.com/docs/28705/mcx0x0xpro.pdf, ComponentLink1URL=http://www.vishay.com/docs/28705/mcx0x0xpro.pdf, Composition="Thin Film", Failure Rate=-, Features=Anti-Sulfur, Height - Seated (Max)="0.015\" (0.37mm)", Packaging="Cut Tape (CT)", Part Status=Active, Pricing 1="1=0.3, 10=0.254, 100=0.0993, 1000=0.04158, 2500=0.03812, 5000=0.03465 (USD)", RoHS="RoHS Compliant", Size / Dimension="0.039\" L x 0.020\" W (1.00mm x 0.50mm)", Stock 1=91476, Supplier 1=Digi-Key
U1: library part Beaglebone_Black, "Beaglebone Black Header", Current Rating="5.7A per Contact", Insulation Color=Black, Manufacturer="Samtec Inc.", Manufacturer Part Number=SSW-123-03-G-D, Material Flammability Rating="UL94 V-0", Operating Temperature="-55°C ~ 125°C", Supplier Part Number 1=SSW-123-03-G-D-ND, Voltage Rating=-, Applications=-, Category="Connectors, Interconnects", Connector Type=Receptacle, Contact Finish - Mating=Gold, Contact Finish - Post=Gold, Contact Finish Thickness - Mating="20.0µin (0.51µm)", Contact Finish Thickness - Post="3.00µin (0.076µm)", Contact Length - Post="0.394\" (10.00mm)", Contact Material="Phosphor Bronze", Contact Shape=Square, Contact Type=Forked, Fastening Type=Push-Pull, Features=-, Ingress Protection=-, Insulation Height="0.335\" (8.51mm)", Insulation Material="Liquid Crystal Polymer (LCP)", Mated Stacking Heights=-, Mounting Type="Through Hole", Number of Positions=46, Number of Positions Loaded=All, Packaging=Bulk, Part Status=Active, Pitch - Mating="0.100\" (2.54mm)", Pricing 1="1=6.51 (USD)", RoHS="RoHS Compliant", Row Spacing - Mating="0.100\" (2.54mm)", Stock 1=0, Style="Board to Board or Cable", Supplier 1=Digi-Key, Termination=Solder
U2 U9: library part CMP-0793-00136-1, "4.5 Ohm Ron, 8-Channel +/-5 V,+12 V, +5 V and +3.3 V Multiplexer, 16-pin SOP (RU-16), Tube", Base Part Number=ADG1608, Channel Capacitance (CS(off), CD(off))="19pF, 117pF", Current - Leakage (IS(off)) (Max)=100pA, Manufacturer="Analog Devices Inc.", On-State Resistance (Max)="4.5 Ohm", Operating Temperature="-40°C ~ 125°C (TA)", Package / Case="16-TSSOP (0.173\", 4.40mm Width)", Supplier Device Package=16-TSSOP, Supplier Part Number 1=ADG1608BRUZ-ND, Voltage - Supply, Dual (V±)="±3.3 V ~ 8 V", Voltage - Supply, Single (V+)="3.3 V ~ 16 V", -3db Bandwidth=40MHz, Category="Integrated Circuits (ICs)", Channel-to-Channel Matching (&Delta;Ron)="120 mOhm", Charge Injection=29pC, ComponentLink1Description=http://www.analog.com/media/en/technical-documentation/data-sheets/ADG1608_1609.pdf, ComponentLink1URL=http://www.analog.com/media/en/technical-documentation/data-sheets/ADG1608_1609.pdf, Crosstalk="-64dB @ 1MHz", Manufacturer Part Number=ADG1608BRUZ, Multiplexer/Demultiplexer Circuit=8:1, Packaging=Tube, Part Status=Active, Pricing 1="1=9.31, 96=8.01552, 192=6.95979, 576=6.0605 (USD)", RoHS="RoHS Compliant", Stock 1=1151, Supplier 1=Digi-Key, Switch Circuit=-, Switch Time (Ton, Toff) (Max)="94ns, 93ns"
U3 U4 U5 U6 U7 U8 U11: library part CMP-0809-00005-2, "Precision, Low Noise, Rail-to-Rail Output, Zero-Drift Operational Amplifier, 4 to 36 V, -40 to 125 degC, 5-pin SOT23 (DBV5), Green (RoHS & no Sb/Br)", Current - Supply=450µA, Manufacturer="Texas Instruments", Operating Temperature="-40°C ~ 125°C", Package / Case="SC-74A, SOT-753", Supplier Device Package=SOT-23-5, Supplier Part Number 1=296-40438-1-ND, Voltage - Supply, Single/Dual (±)="4 V ~ 36 V, ±2 V ~ 18 V", Amplifier Type=Zero-Drift, Category="Integrated Circuits (ICs)", ComponentLink1Description=http://www.ti.com/lit/ds/symlink/opa188.pdf, ComponentLink1URL=http://www.ti.com/lit/ds/symlink/opa188.pdf, Manufacturer Part Number=OPA188AIDBVR, Mounting Type="Surface Mount", Output Type=Rail-to-Rail, Packaging="Cut Tape (CT)", Part Status=Active, Pricing 1="1=2.46, 10=2.211, 100=1.7771, 500=1.46002, 1000=1.20974 (USD)", RoHS="RoHS Compliant", Slew Rate="0.8 V/µs", Stock 1=1779, Supplier 1=Digi-Key
U10: library part CMP-0249-00017-1, "IC ADC 16BIT SRL 200KSPS 10UMAX", Base Part Number=MAX11100, Manufacturer="Maxim Integrated", Manufacturer Part Number=MAX11100EUB+, Operating Temperature="-40°C ~ 85°C", Package / Case="10-TFSOP, 10-MSOP (0.118\", 3.00mm Width)", Supplier Device Package=10-uMAX, Supplier Part Number 1=MAX11100EUB+-ND, Voltage - Supply, Analog=5V, Voltage - Supply, Digital="2.7 V ~ 5.25 V", Architecture=SAR, Category="Integrated Circuits (ICs)", ComponentLink1Description=https://datasheets.maximintegrated.com/en/ds/MAX11100.pdf, ComponentLink1URL=https://datasheets.maximintegrated.com/en/ds/MAX11100.pdf, Configuration=S/H-ADC, Data Interface=SPI, Features=-, Input Type="Single Ended", Number of Bits=16, Number of Inputs=1, Packaging=Tube, Part Status=Active, Pricing 1="1=5.98, 10=5.855 (USD)", Ratio - S/H:ADC=1:1, Reference Type=External, RoHS="RoHS Compliant", Sampling Rate (Per Second)=200k, Stock 1=927, Supplier 1=Digi-Key
U12: "IC VREF SERIES 4.096V SOT23", Current - Supply=350µA, Manufacturer="Maxim Integrated", Operating Temperature="-40°C ~ 125°C (TA)", Package / Case=SOT-23-6, Supplier Part Number 1=MAX6070AAUT41+TCT-ND, Temperature Coefficient=6ppm/°C, Tolerance=±0.04%, Voltage - Input="4.3 V ~ 5.5 V", Voltage - Output (Min/Fixed)=4.096V, Category="Integrated Circuits (ICs)", ComponentLink1Description=https://datasheets.maximintegrated.com/en/ds/MAX6070-MAX6071.pdf, ComponentLink1URL=https://datasheets.maximintegrated.com/en/ds/MAX6070-MAX6071.pdf, Manufacturer Part Number=MAX6070AAUT41+T, Mounting Type="Surface Mount", Noise - 0.1Hz to 10Hz=9.6µVp-p, Noise - 10Hz to 10kHz=9µVrms, Output Type=Fixed, Packaging="Cut Tape (CT)", Part Status=Active, Pricing 1="1=3.41, 10=3.213, 25=2.5704, 50=2.4418, 100=2.2491, 250=2.13344, 500=2.05634 (USD)", Reference Type=Series, RoHS="RoHS Compliant", Stock 1=2623, Supplier 1=Digi-Key, Supplier Device Package=SOT-23-6
U13: library part CMP-0809-00010-2, "0.03 uV/C, Low Noise, Rail-to-Rail Output, Zero-Drift Operational Amplifier, 4 to 36 V, -40 to 125 degC, 14-pin SOP (PW14), Green (RoHS & no Sb/Br)", Manufacturer="Texas Instruments", Rating=Catalog, Total Supply Voltage(Max)(+5V is 5, +/-5V is 10)=36, Total Supply Voltage(Min)(+5V is 5, +/-5V is 10)=4, CMRR(Min)(dB)=120, Code_JEDEC=MO-153, ComponentLink1Description="Manufacturer URL", ComponentLink1URL=http://www.ti.com/, ComponentLink2Description=Datasheet, ComponentLink2URL=http://www.ti.com/lit/ds/symlink/opa4188.pdf, ComponentLink3Description="Package Specification", ComponentLink3URL=http://www.ti.com/litv/pdf/mpds360, DatasheetVersion=SBOS641B, Eco-Plan="Green (RoHS & no Sb/Br)", GBW(Typ)(MHz)=2, Iq per channel(Max)(mA)=0.475, Mounting Technology="Surface Mount", Number of Channels=4, Offset Drift(Typ)(uV/C)=0.03, PackageDescription="14-Pin Plastic Small Outline, Body 5 x 4.4 mm, Pitch 0.65 mm", PackageReference=PW0014A, PackageVersion="4040064-3/G, 02/2011", PartId=1, PartNumber=OPA4188AIPW, Slew Rate(Typ)(V/us)=0.8, SubFamily="High Supply Voltage Amplifier (>=30V), Low Noise Amp (<=10nV/rtHz), Low Offset Voltage Amplifier (<=500uV), Low Power Amp (<=500uA), Zero Drift Precision Amplifier"

## Free pads (board coordinates)
  round 5 hole 3 unplated: ""(-902.635,-532.387) ""(-902.635,-472.387) ""(-848.635,-532.387) ""(-848.635,-472.387)

## Via types
v1: diameter 1.27, hole 0.711, Top Layer to Bottom Layer, 45 vias

## Nets (pads, with @x,y where several pads share a name; then routed paths per layer and width w, separated by ;. In a path a pad name is that pad's centre, name@x,y a point inside that pad or via, vN(x,y) a via of type N, cw(c..) or ccw(c..) an arc to the next point about the centre after c; other vN are vias at no path point)
+3.3: C8.1 P1.5 P2.26 P3.3 P3.4 P4.20 U1.9-15 U2.2 U2.13 U9.4 U10.3 U13.4 | length 20.8
  Top Layer w0.254: v1(-882.192,-491.998) -882.192,-492.345 -881.083,-493.454 U9.4 ; v1(-882.083,-502.796) -880.548,-501.261 C8.1 -879.206,-501.344 U10.3
  Bottom Layer w0.254: U2.13 -851.343,-545.067 -850.299,-544.023 ; v1(-850.46,-541.912) -850.299,-542.073 -850.299,-543.911 -850.243,-543.967 -849.199,-543.967 -848.999,-543.767 U2.2
"+3.3 BBB": U1.9-3 U1.9-4 | length 2.5
  Top Layer w0.254: U1.9-4 U1.9-3
+5: C1.2 C2.2 C3.2 C4.2 C5.2 C6.2 C7.1 DS1.1 P1.1 P2.21 P4.19 R22.1 U3.5 U4.5 U5.5 U6.5 U7.5 U8.5 U9.2 U9.13 U10.7 U11.5 U12.3 U12.4 | length 101.4
  Top Layer w0.254: U7.5@-886.22,-575.976 -886.193,-575.949 -884.548,-575.949 -883.758,-576.739 C5.2 ; U3.5 -883.658,-568.991 -881.448,-571.201 v1(-881.448,-571.401) ; U4.5@-886.22,-561.371 -886.22,-558.676 -885.969,-558.425 v1(-885.969,-556.669) ; v1(-879.416,-486.667) -879.416,-490.876 -878.138,-492.154 -873.588,-492.154 -872.288,-493.454 U9.13 ; v1(-875.479,-509.4) -875.479,-507.951 U12.3 -872.459,-507.882 -872.286,-508.055 -872.286,-510.572 -871.426,-511.432 -871.076,-511.432 ; C4.2 -873.981,-566.626 v1(-872.431,-566.626) -873.731,-567.926 -873.731,-568.793 -873.929,-568.991 U6.5@-874.155,-568.991 ; -874.155,-576.611 -874.155,-574.446 -874.082,-574.373 v1(-871.948,-574.373) ; U8.5@-874.155,-561.371 C6.2@-874.155,-558.765 ; C6.2 -873.93,-558.727 v1(-873.93,-556.923) ; U10.7 -870.474,-501.844 -869.787,-502.531 C7.1 -869.189,-502.979 -867.447,-502.979 -866.741,-503.685 v1(-866.716,-503.685) ; P4.19 -865.389,-448.575 -865.389,-446.943 -860.233,-441.787 -854.179,-441.787 -853.965,-441.573 DS1.1@-853.965,-441.191 ; R22.1 -864.743,-498.712 v1(-864.743,-501.269)
  Bottom Layer w0.254: P1.1@-901.817,-482.387 -901.817,-482.465 -883.618,-482.465 v1(-879.416,-486.667)
  other v1: -884.521,-575.923
"+5 BBB": P2.2 R14.1 U1.9-5 U1.9-6 | length 111.2
  Top Layer w0.254: R14.1 -862.076,-499.364 v1(-860.044,-501.396) ; U1.9-6 U1.9-5
  Mid-Layer 2 w0.254: v1(-860.044,-501.396) -853.186,-501.396 -852.721,-500.931 -852.721,-498.478 ; U1.9-6 U1.9-5 -849.214,-567.655 -849.214,-541.901 -852.721,-538.394 -852.721,-498.478 ; P2.2@-849.841,-482.387 P2.2 -852.572,-485.054 -852.572,-498.33 -852.721,-498.478
  Bottom Layer w0.254: U1.9-6 U1.9-5
+12: P1.13 P2.29 P2.30 P3.1 P3.2 P4.21 P4.22 R15.1 R27.1 | length 207
  Top Layer w0.254: R15.1 -886.206,-497.675 v1(-886.206,-500.634) -886.206,-513.969 -880.872,-519.303 -850.521,-519.303 P2.30@-849.329,-518.111 ; P4.22 P4.21 -845.621,-468.575 -845.621,-516.367 -847.005,-517.751 -847.005,-518.327 -847.221,-518.111 P2.30@-849.329,-518.111 ; P3.2 P3.1 -856.58,-562.575 -856.834,-562.321 -856.834,-525.04 -850.193,-518.399 -849.617,-518.399 P2.30@-849.329,-518.111
  Bottom Layer w0.254: P1.13@-901.895,-497.627 -901.731,-497.791 -887.906,-497.791 -886.206,-499.491 v1(-886.206,-500.634)
-5: P1.17 P2.25 P4.3 R29.2 U9.3 U11.2 | length 170.6
  Top Layer w0.254: P1.17@-901.365,-502.871 P1.17@-901.201,-502.707 ; P1.17@-901.127,-502.422 -901.127,-502.633 P1.17@-901.201,-502.707 ; -888.678,-490.192 -887.095,-488.609 -882.333,-488.609 -878.138,-492.804 -875.928,-492.804 -873.794,-494.938 -873.794,-503.408 -874.429,-504.043 -877.173,-504.043 -878.205,-505.076 -878.205,-509.437 -876.969,-510.673 -874.481,-510.673 -873.161,-511.993 -869.121,-511.993 -868.283,-511.155 -861.348,-511.155 -859.79,-512.714 -859.79,-514.042 -862.39,-516.642 -876.131,-516.642 v1@-876.134,-516.639 ; P4.3 -887.095,-488.601 P1.17@-901.201,-502.707 ; R29.2 -876.681,-518.248 -876.495,-518.062 v1(-876.495,-516.639) -876.326,-516.47 v1@-876.326,-516.447 ; -876.326,-515.242 v1@-876.326,-516.447 ; P2.25@-847.365,-513.031 -847.493,-513.031 -847.493,-512.867 -848.725,-514.099 -859.793,-514.099 -862.333,-516.639 v1@-876.134,-516.639 ; v1@-876.326,-516.447 v1@-876.134,-516.639
"ADC REF": C10.2 U10.6 U12.5 U12.6 | length 7.9
  Top Layer w0.254: U10.6 -872.284,-502.344 -872.286,-502.346 -872.286,-505.809 -872.459,-505.982 U12.6 U12.5 -872.633,-506.905 -869.917,-506.905 C10.2
AIN: U9.8 U10.5 | length 8.5
  Top Layer w0.254: U9.8 -876.638,-496.054 -875.08,-497.612 -875.08,-502.001 -875.421,-502.342 -876.057,-502.342 U10.5
"Arrestment Heater FET": R4.1 U1.8-3 U4.3 | length 10.5
  Top Layer w0.254: U1.8-3 -895.955,-563.596 -891.676,-563.596 R4.1@-891.351,-563.271 ; R4.1@-891.378,-563.298 R4.1@-891.351,-563.271 ; U4.3@-889.17,-563.271 R4.1@-891.351,-563.271
"Arrestment Heater FET_Buff": DS3.1 P4.16 U4.1 U4.4 | length 148
  Top Layer w0.254: U4.1@-889.17,-561.371 -888.972,-561.569 -888.197,-561.569 -886.495,-563.271 -886.22,-563.271 -886.187,-563.304 -884.299,-563.304 v1(-884.266,-563.337)
  Mid-Layer 2 w0.254: v1(-884.266,-563.337) -873.241,-552.312 -873.241,-448.807 P4.16
  Bottom Layer w0.254: DS3.1 -904.238,-561.615 -885.988,-561.615 v1(-884.266,-563.337)
Batt_1_Stat: P1.8
Batt_2_Stat: P1.10
Battery_1: P1.11 R20.1 | length 25.2
  Top Layer w0.254: v1(-884.496,-500.634) -884.496,-498.758 R20.1
  Bottom Layer w0.254: P1.11@-901.895,-495.087 -901.731,-495.251 -886.847,-495.251 -884.496,-497.602 v1(-884.496,-500.634)
Battery_2: P1.15 R21.1 | length 28.1
  Top Layer w0.254: R21.1 -879.431,-497.718 -878.546,-497.718 -878.167,-498.097 v1(-877.892,-498.097)
  Bottom Layer w0.254: P1.15@-901.895,-500.167 -901.529,-500.167 -900.173,-501.523 -881.318,-501.523 v1(-877.892,-498.097)
BBB_PWR_SW: P2.4 U1.9-9 | length 91.8
  Mid-Layer 2 w0.254: U1.9-9 -848.833,-572.354 -848.833,-541.743 -852.191,-538.385 -852.191,-487.213 P2.4 P2.4@-849.841,-484.927
"Board Heater FET 1": R6.1 U1.8-7 U5.3 | length 25.4
  Top Layer w0.254: U1.8-7 -894.75,-571.211 -893.064,-572.897 -883.412,-572.897 -880.491,-575.818 R6.1 -880.328,-578.361 U5.3
"Board Heater FET 2": R10.1 U1.8-8 U7.3 | length 16.1
  Top Layer w0.254: U1.8-8 -901.03,-571.373 -899.76,-572.643 -896.493,-572.643 -894.715,-574.421 -894.715,-577.596 -894.246,-578.065 R10.1 -892.021,-578.038 U7.3
"Board Heater FET_Buff 1": DS4.1 P4.17 U5.1 U5.4 | length 169.4
  Top Layer w0.254: -877.105,-576.611 -876.907,-576.809 -876.132,-576.809 -874.43,-578.511 v1@-874.155,-578.511
  Mid-Layer 2 w0.254: v1(-873.852,-578.577) -869.315,-574.04 P4.17
  Bottom Layer w0.254: DS4.1 -904.386,-589.207 -902.646,-587.467 -882.742,-587.467 v1(-873.852,-578.577)
"Board Heater FET_Buff 2": DS6.1 P4.18 U7.1 U7.4 | length 169.1
  Top Layer w0.254: U7.1@-889.17,-575.976 -888.972,-576.174 -888.197,-576.174 -886.495,-577.876 U7.4@-886.22,-577.876
  Bottom Layer w0.254: DS6.1 -904.386,-581.587 -902.646,-579.847 -887.695,-579.847 v1(-885.79,-577.942) -884.66,-576.812 -873.13,-576.812 -868.161,-571.843 -868.161,-448.575 P4.18
CH1: R15.2 R18.1 U9.5 | length 11.4
  Top Layer w0.254: R18.1 R15.2 -884.845,-494.104 U9.5
CH2: R20.2 R23.1 U9.6 | length 7.8
  Top Layer w0.254: R23.1 R20.2 -882.192,-494.754 U9.6
CH3: R21.2 R24.1 U9.7 | length 4
  Top Layer w0.254: R24.1 R21.2 ; R21.2@-879.644,-495.404 U9.7
CH4: R26.2 U9.12 U11.1 | length 38.7
  Top Layer w0.254: U9.12 v1(-861.59,-494.104) ; -871.076,-513.972 -871.076,-512.702 -871.051,-512.677 -861.661,-512.677 v1(-861.636,-512.651)
  Bottom Layer w0.254: v1@-861.59,-512.113 v1(-861.59,-494.104)
CH5: R14.2 R17.1 U9.11 | length 11.8
  Top Layer w0.254: U9.11 -863.677,-494.754 R14.2 R17.1
CH6: R22.2 R25.1 U9.10 | length 8.2
  Top Layer w0.254: U9.10 -866.351,-495.404 R22.2 -863.749,-496.377 R25.1
CH7: R16.2 R19.1 U9.9 | length 4.6
  Top Layer w0.254: U9.9 -869.502,-496.054 -869.179,-496.377 R16.2 R19.1
"Conning Tower FET": R12.1 U1.8-4 U8.3 | length 25.5
  Top Layer w0.254: U1.8-4 -900.014,-567.147 -883.387,-567.147 -879.673,-563.433 U8.3 ; U8.3@-877.132,-563.298 U8.3@-877.105,-563.271
"Conning Tower Heater FET Buff": DS7.1 P4.14 U8.1 U8.4 | length 152.9
  Top Layer w0.254: U8.1@-877.105,-561.371 -876.907,-561.569 -876.132,-561.569 -874.43,-563.271 -874.155,-563.271 -874.122,-563.304 -872.234,-563.304 v1(-872.201,-563.337)
  Bottom Layer w0.254: DS7.1 -876.965,-552.631 -872.201,-557.395 v1(-872.201,-563.337) ; -878.654,-552.529 -878.654,-502.314 -875.781,-499.441 -875.781,-448.807 P4.14
FB_CS0: P2.5 U2.6 | length 61.2
  Bottom Layer w0.254: U2.6 -846.429,-546.367 -844.642,-544.58 -844.642,-489.45 P2.5@-846.625,-487.467
FB_MUX_A0: P1.28 U1.8-25 | length 84.1
  Mid-Layer 1 w0.254: P1.28@-904.435,-515.407 -904.435,-515.6 -904.628,-515.6 -905.439,-516.411 -905.439,-590.563 -903.201,-592.801 -899.76,-592.801 U1.8-25
FB_MUX_A1: P1.26 U1.8-26 | length 85.6
  Mid-Layer 1 w0.254: P1.26@-904.511,-512.575 -904.921,-512.575 -905.82,-513.474 -905.82,-591.567 -903.316,-594.071 U1.8-26
"Gearbox Heater FET": R8.1 U1.8-6 U6.3 | length 25.7
  Top Layer w0.254: U1.8-6 -900.014,-567.655 -882.801,-567.655 -879.565,-570.891 U6.3@-877.105,-570.891
"Gearbox Heater FET_Buff": DS5.1 P4.15 U6.1 U6.4 | length 158.1
  Top Layer w0.254: U6.1@-877.105,-568.991 -876.907,-569.189 -876.132,-569.189 -874.43,-570.891 v1(-874.155,-570.891)
  Mid-Layer 2 w0.254: v1(-874.155,-570.891) -871.312,-568.048 -871.312,-509.348 -871.855,-508.805 P4.15
  Bottom Layer w0.254: DS5.1 -904.386,-568.379 -903.662,-567.655 -877.391,-567.655 v1(-874.155,-570.891)
GND: C1.1 C2.1 C3.1 C4.1 C5.1 C6.1 C7.2 C8.2 C9.2 C10.1 P1.3 P1.24 P1.27 P2.1 P2.19 P2.20 P2.22 P2.23 P2.24 P2.27 P2.28 P4.1 P4.2 P4.23 P4.24 R1.2 R2.2 R3.2 R4.2 R5.2 R6.2 R7.2 R8.2 R9.2 R10.2 R11.2 R12.2 R13.2 R17.2 R18.2 R19.2 R23.2 R24.2 R25.2 U1.8-1 U1.8-2 U1.9-1 U1.9-2 U1.9-43 U1.9-44 U1.9-45 U1.9-46 U2.3 U2.14 U3.2 U4.2 U5.2 U6.2 U7.2 U8.2 U9.14 U10.2 U10.4 U10.8 U11.3 U12.2 U13.11
Heartbeat: U1.8-29 U1.9-42 | length 52
  Top Layer w0.254: U1.8-29 -883.25,-614.391 U1.9-42
"Meter Heater FET": R2.1 U1.8-5 U3.3 | length 10.2
  Top Layer w0.254: U1.8-5 -893.977,-568.671 -891.757,-570.891 U3.3
"Meter Heater FET_Buff": DS2.1 P4.13 U3.1 U3.4 | length 161.2
  Top Layer w0.254: U3.1 -888.972,-569.189 -888.197,-569.189 -886.495,-570.891 U3.4
  Bottom Layer w0.254: DS2.1 -904.386,-574.983 -902.138,-572.735 -887.695,-572.735 v1(-885.79,-570.83) -884.329,-572.29 -874.297,-572.29 -871.312,-569.305 -871.312,-453.044 P4.13
"MUX A2": P4.7 U13.1 U13.2 | length 136.9
  Mid-Layer 1 w0.254: P4.7 -880.559,-451.417 -880.559,-586.3
  other v1: -880.491,-583.311
"MUX A3": P4.11 U13.13 U13.14 | length 146.8
  Mid-Layer 2 w0.254: v1(-887.65,-592.288) -887.65,-460.676 P4.11
"MUX D2": U1.8-16
MUX_A0: P4.8 U13.8 U13.9 | length 139.7
  Mid-Layer 1 w0.254: -883.377,-586.578 -883.377,-448.783 P4.8
  other v1: -883.412,-585.215
MUX_A1: P4.6 U13.6 U13.7 | length 155.9
  Mid-Layer 2 w0.254: v1(-894.091,-596.911) -894.091,-452.785 -890.113,-448.807 -885.941,-448.807 P4.6
MUX_D0: U1.8-14
MUX_D1: U1.8-15
NetC9_1: C9.1 U12.1 | length 1.9
  Top Layer w0.254: C9.1 -877.208,-506.03 -875.458,-506.03 U12.1
NetDS1_2: DS1.2 R1.1 | length 2.1
  Top Layer w0.254: DS1.2@-852.365,-441.191 R1.1
NetDS2_2: DS2.2 R3.1 | length 2.1
  Bottom Layer w0.254: R3.1@-906.618,-576.633 -904.636,-576.633 DS2.2
NetDS3_2: DS3.2 R5.1 | length 2.6
  Bottom Layer w0.254: R5.1@-907.126,-562.917 -907.076,-562.867 DS3.2
NetDS4_2: DS4.2 R7.1 | length 2.6
  Bottom Layer w0.254: R7.1 -904.671,-590.892 DS4.2
NetDS5_2: DS5.2 R9.1 | length 2.4
  Bottom Layer w0.254: R9.1 -906.822,-569.979 DS5.2
NetDS6_2: DS6.2 R11.1 | length 2.1
  Bottom Layer w0.254: R11.1@-906.618,-583.237 -904.636,-583.237 DS6.2
NetDS7_2: DS7.2 R13.1 | length 2.1
  Bottom Layer w0.254: R13.1 -906.568,-554.231 DS7.2
NetR26_1: R26.1 R28.2 U11.4 | length 3.7
  Top Layer w0.254: R28.2 R26.1 ; R26.1@-878.782,-512.702 -876.326,-512.702
NetR27_2: R27.2 R28.1 R29.1 | length 4
  Top Layer w0.254: R27.2 R29.1 R28.1
NetU1_8-9: U1.8-9
NetU1_8-10: U1.8-10
NetU1_8-11: U1.8-11
NetU1_8-12: U1.8-12
NetU1_8-17: U1.8-17
NetU1_8-18: U1.8-18
NetU1_8-27: U1.8-27
NetU1_8-30: U1.8-30
NetU1_8-35: U1.8-35
NetU1_8-36: U1.8-36
NetU1_8-37: U1.8-37
NetU1_8-38: U1.8-38
"Power A0": U1.8-42 U9.1 | length 143.3
  Top Layer w0.254: U1.8-42 -902.046,-613.375 -902.046,-557.609 -890,-545.563 v1(-890,-493.655) ; U9.1 -877.384,-491.5 v1(-877.384,-488.953)
  Bottom Layer w0.254: v1(-890,-493.655) -885.492,-489.148 -877.578,-489.148 v1(-877.384,-488.953)
"Power A1": U1.8-43 U9.16 | length 148.9
  Top Layer w0.254: U9.16 -870.788,-491.504 -869.888,-490.604 v1(-865.827,-490.604)
  Mid-Layer 2 w0.254: U1.8-43 -899.506,-615.915 -899.506,-611.43 -898.403,-610.327 -898.069,-610.327 -863.473,-575.731 -863.473,-492.958 v1(-865.827,-490.604)
"Power A2": U1.8-44 U9.15 | length 147.2
  Top Layer w0.254: U9.15 -871.52,-492.172 -866.926,-492.172 v1(-866.843,-492.255)
  Mid-Layer 2 w0.254: U1.8-44 -902.716,-615.245 -902.716,-606.298 -901.954,-605.536 -898.144,-605.536 -868.934,-576.326 -868.934,-494.346 v1(-866.843,-492.255)
Power_CS0: P2.9 U2.4 | length 54.5
  Bottom Layer w0.254: U2.4 -846.429,-545.067 -845.023,-543.661 -845.023,-494.149 P2.9@-846.625,-492.547
PWM1A: P2.8 U1.9-14 | length 94.2
  Mid-Layer 2 w0.254: U1.9-14 -851.246,-577.307 -849.809,-577.307 -845.587,-573.085 -845.587,-526.211 v1(-848.936,-522.862)
  Bottom Layer w0.254: P2.8@-849.165,-490.007 -848.784,-490.388 -848.784,-522.71 v1(-848.936,-522.862)
PWM2A: P1.18 U1.8-19 | length 89.9
  Mid-Layer 2 w0.254: P1.18@-903.905,-502.871 -902.901,-503.875 -900.069,-503.875 -899.333,-504.611 -899.333,-541.187 -900.88,-542.734 -900.891,-542.734 -902.046,-543.889 -902.046,-581.792 -901.053,-582.785 -900.719,-582.785 -899.726,-583.778 -899.726,-585.215 U1.8-19
PWM2B: P1.22 U1.8-13 | length 76.9
  Mid-Layer 1 w0.254: P1.22@-904.435,-507.787 -904.069,-507.787 -902.837,-509.019 -899.751,-509.019 -896.874,-511.896 -896.874,-577.215 U1.8-13
Serial1_RX: U1.9-26